# Altium PCB PCB1.PcbDoc
Units mm, origin at the board's own origin, x right, y up, seen from the top; angles counter-clockwise.
Board outline 75 x 64 mm, 4 copper layers (Top Layer, GND 1, GND 2, Bottom Layer), stack 1.783 mm thick; 59 components, 26 nets, 146 pads, 138 vias.
Unrouted connection lines stored in the file: 52.
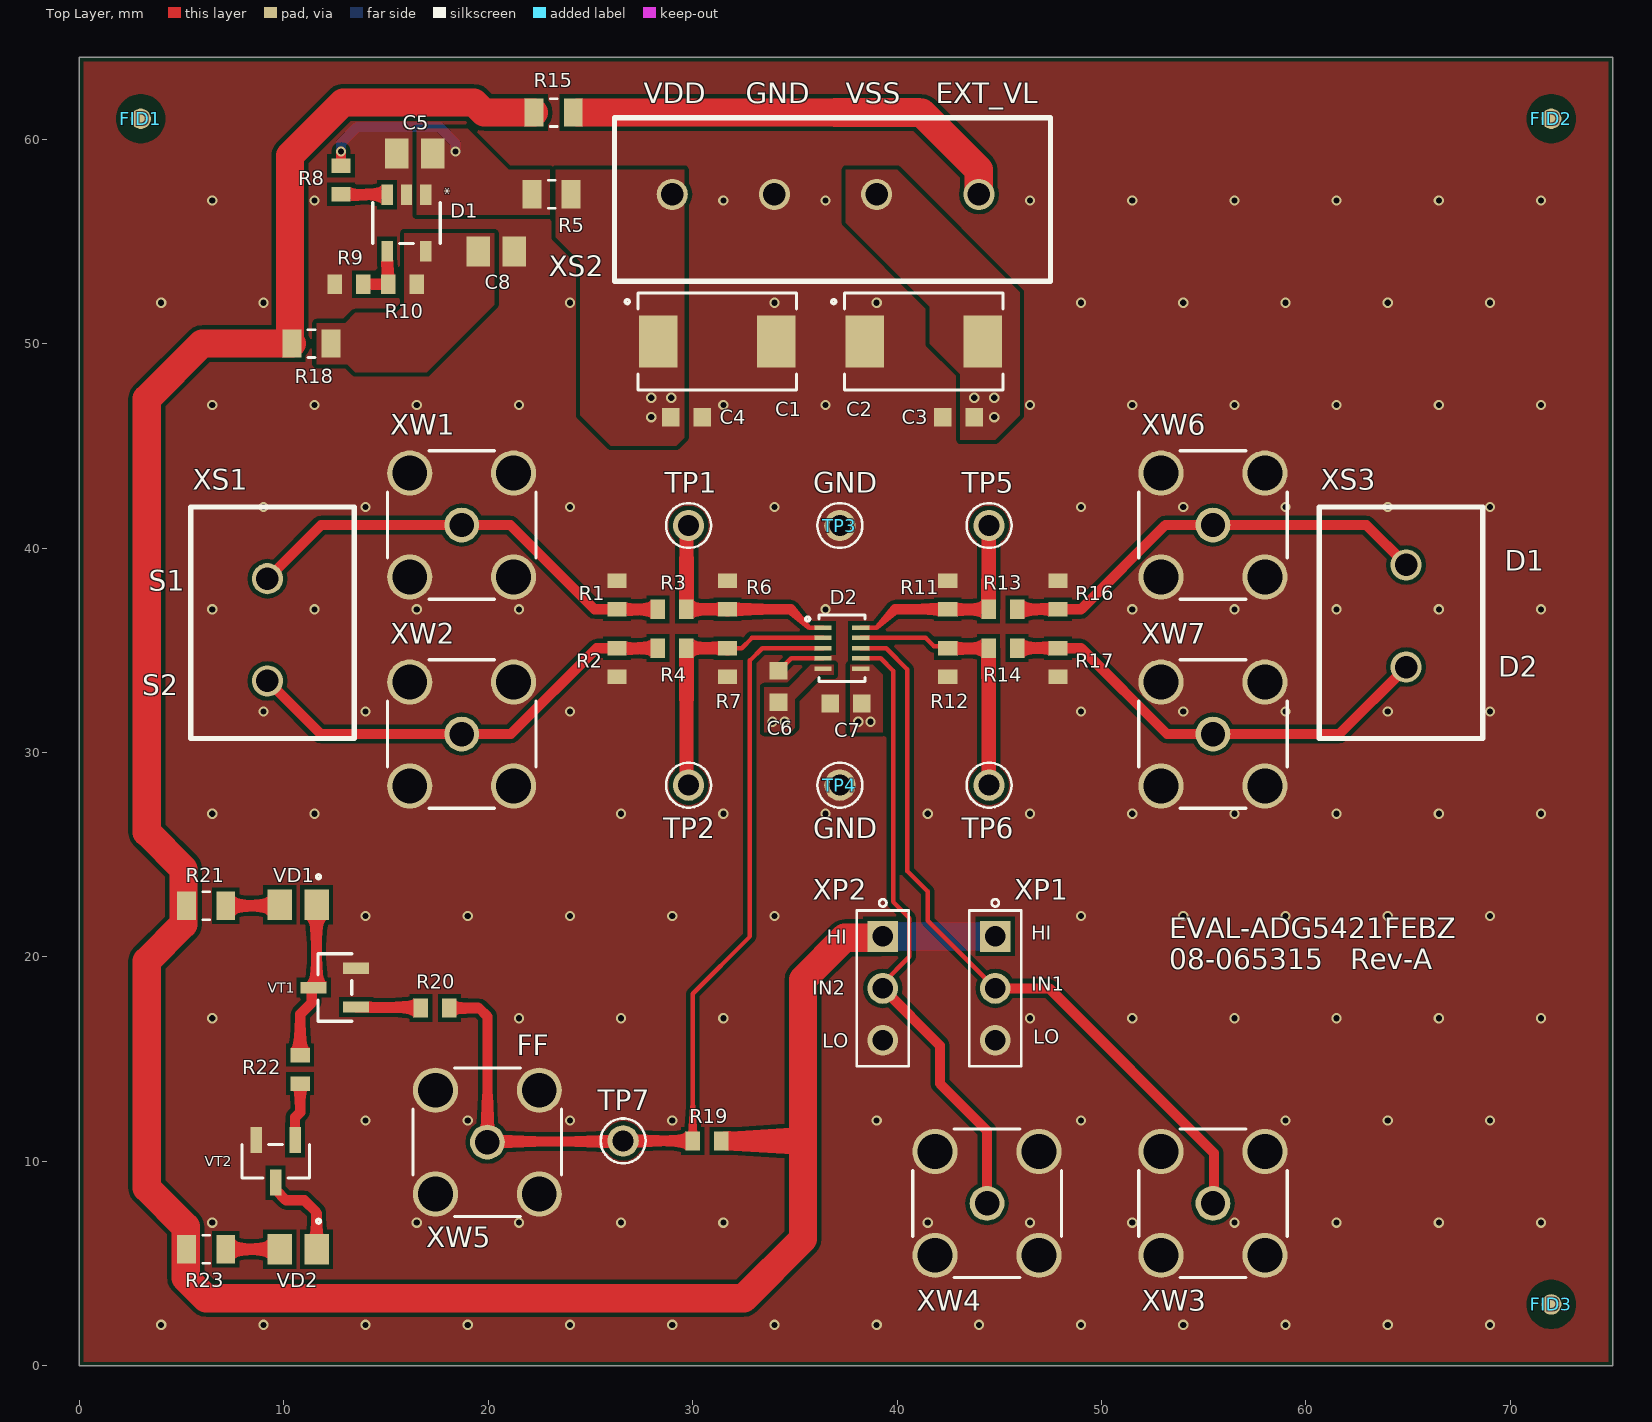
[diagram p0: Top Layer view]
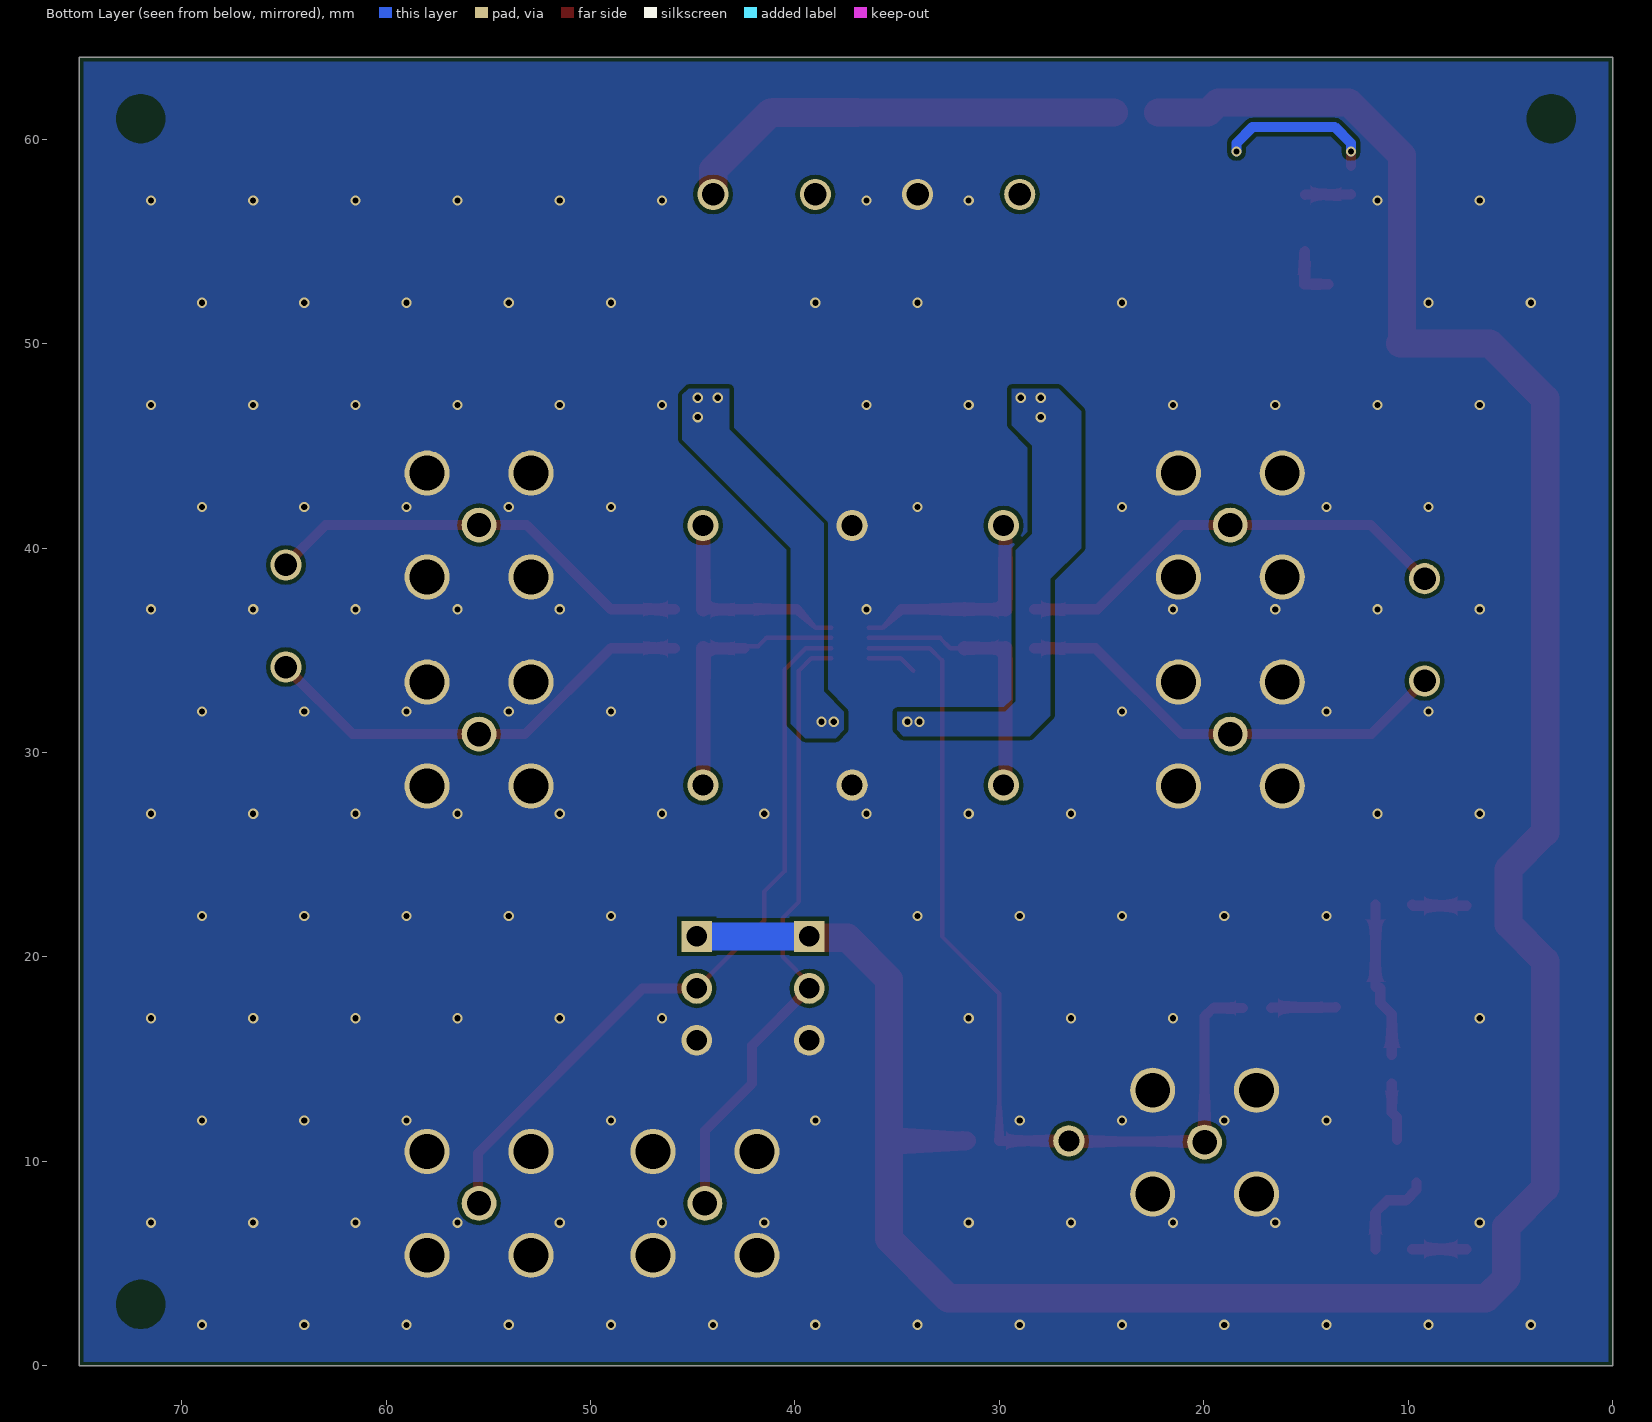
[diagram p1: Bottom Layer view, seen from below]
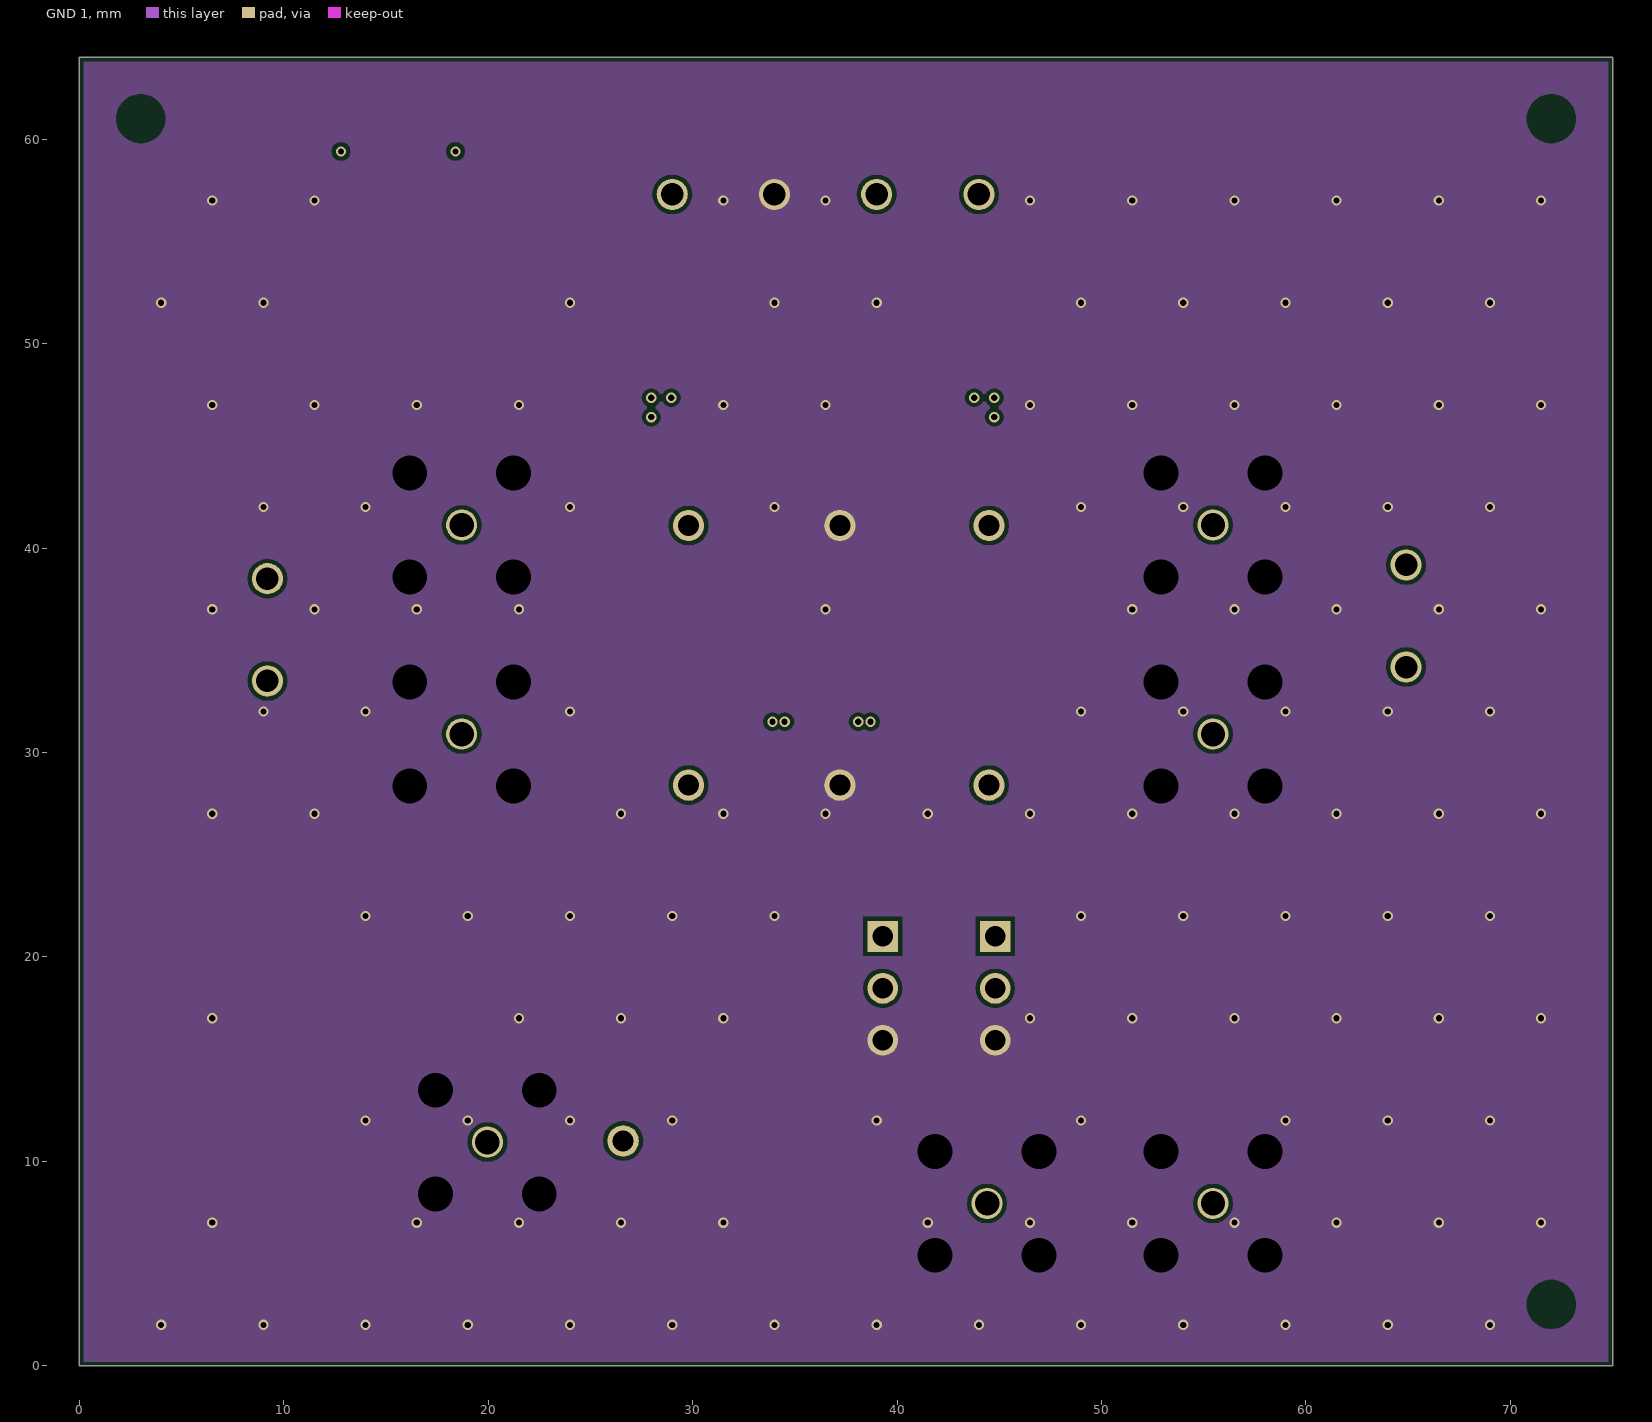
[diagram p2: GND 1]
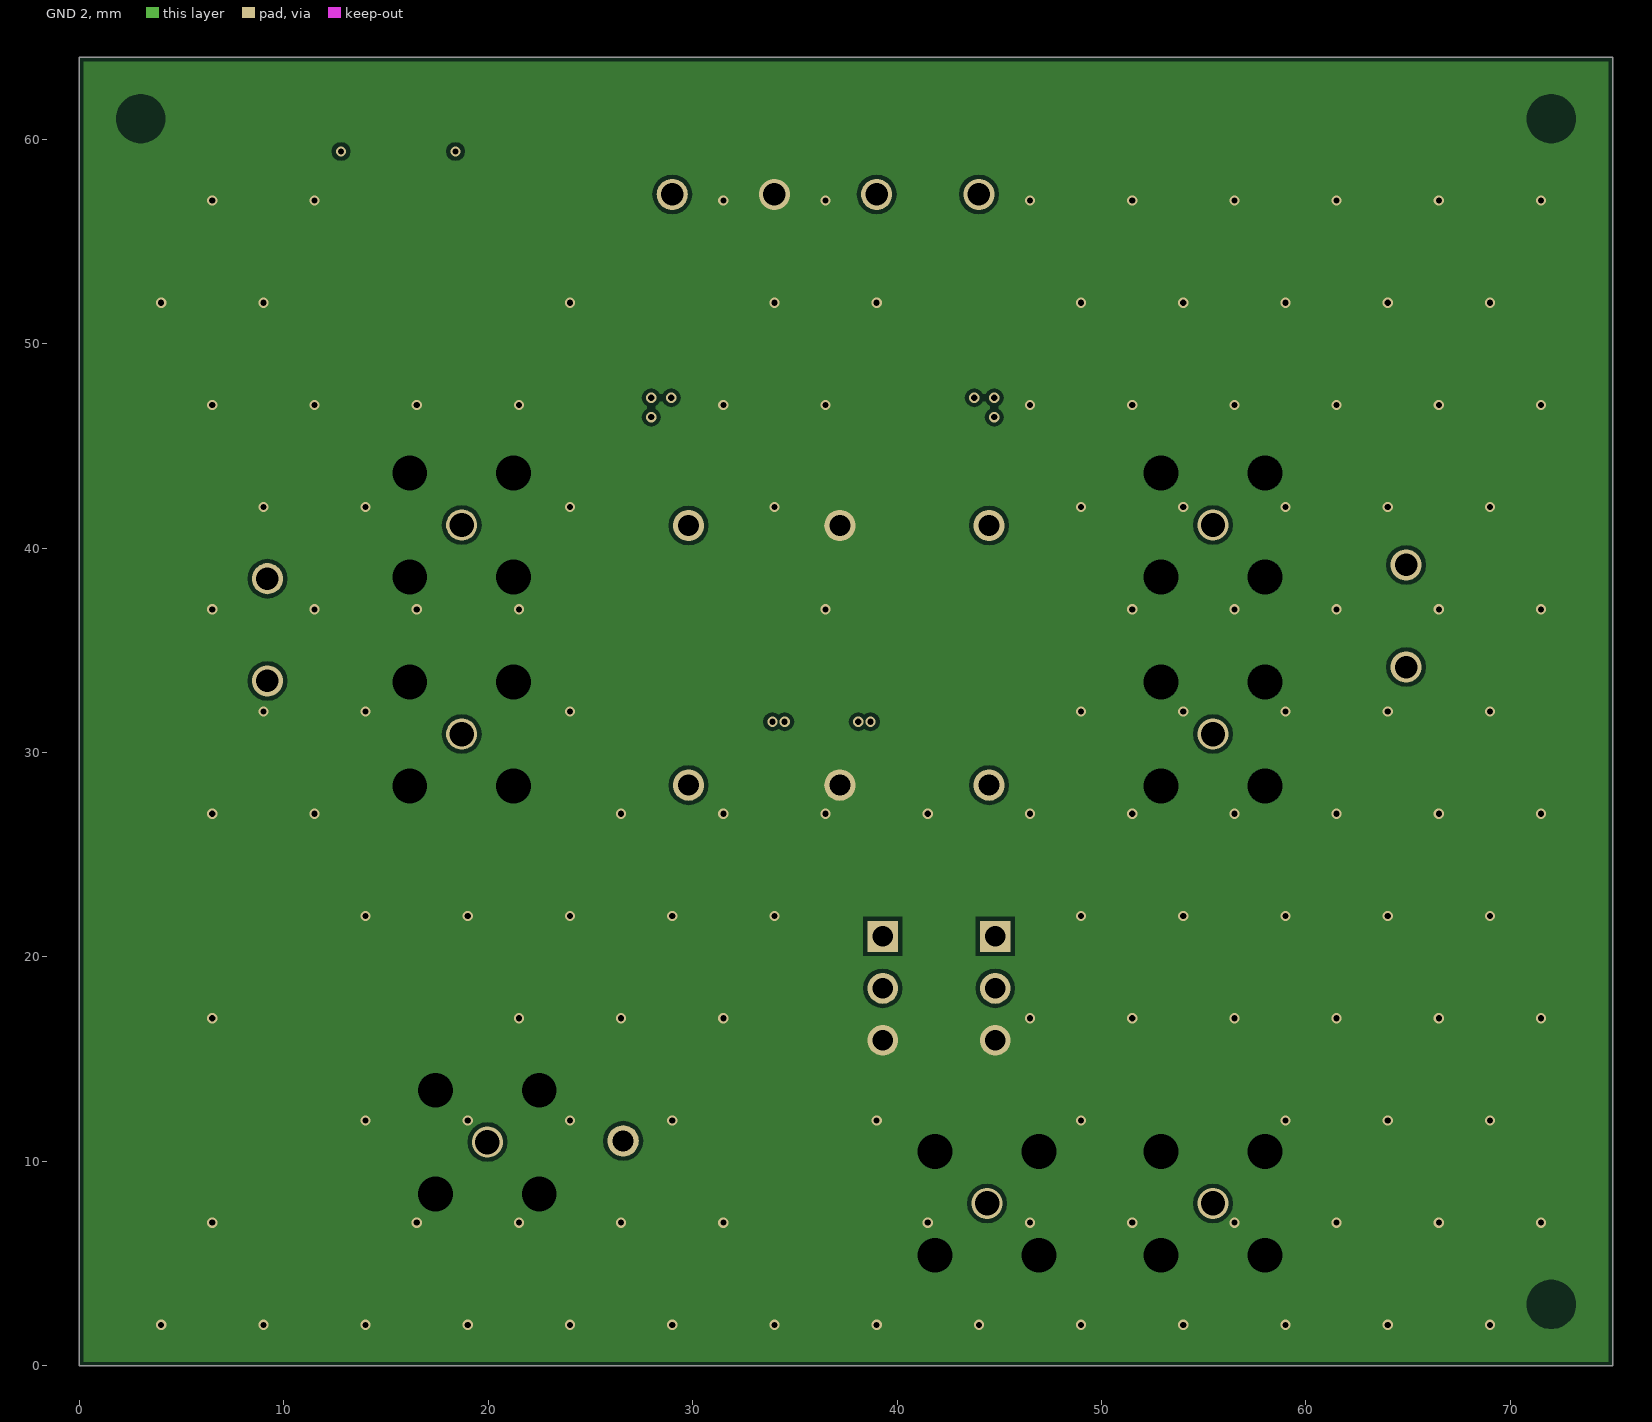
[diagram p3: GND 2]

## Layer stack, top to bottom
Top Solder: solder mask 0.0102, Solder Resist, Dk 3.5
Top Layer: signal copper 0.0356
Dielectric 2: prepreg 0.0711, PP-006, Dk 4.1
GND 1: signal copper 0.035
Dielectric 1: core 1.5, FR-4, Dk 4.8
GND 2: signal copper 0.035
Dielectric 3: prepreg 0.0711, PP-006, Dk 4.1
Bottom Layer: signal copper 0.0356
Bottom Solder: solder mask 0.0102, Solder Resist, Dk 3.5

## Board outline
0,0 75,0 75,64 0,64

## Design rules (kind name [scope] priority, off if disabled: settings)
BoardOutlineClearance [All] p1: gap=0.2 ignorepadtopadclearanceinfootprint=FALSE
Clearance [All] p1: gap=0.2 ignorepadtopadclearanceinfootprint=FALSE
HoleSize [All] p1: absolutevalues=TRUE maxlimit=5 minlimit=0.025 maxpercent=80.000 minpercent=20.000
PolygonConnect [All] p1: connectstyle=Direct reliefconductorwidth=0.254 reliefentries=4 polygonreliefangle="90 Angle" airgapwidth=0.254
RoutingVias [All] p1: holewidth=0.3 width=0.6 viastyle="Through Hole" minholewidth=0.2 minwidth=0.5 maxholewidth=0.4 maxwidth=0.7
SolderMaskExpansion [All] p1: expansion=0.102 istentingtop=FALSE
Width [All] p1: maxlimit=1.5 minlimit=0.2 preferedwidth=0.2
29 further rules are at their usual default settings.

## Components (designator, comment, footprint, x,y, rotation, side; value= is the part's Value field where it differs from the comment)
C1 "CAP_TANT_10uF" CAP_TANT_10UF 31.2,50.1 r0 top value=10мкФ
C2 "CAP_TANT_10uF" CAP_TANT_10UF 41.3,50.1 r0 top value=10мкФ
C3 "CAP_0603_0.1uF" CAP_0603_0.1UF 43,46.4 r180 top value=0.1мкФ
C4 "CAP_0603_0.1uF" CAP_0603_0.1UF 29.7,46.4 r180 top value=0.1мкФ
C5 "CAP_0805_4.7uF" CAP_0805_4.7UF 16.4,59.3 r0 top value=4.7мкФ
C6 "CAP_0603_0.1uF" CAP_0603_0.1UF 34.2,33.228 r270 top value=0.1мкФ
C7 "CAP_0603_0.1uF" CAP_0603_0.1UF 37.5,32.4 r0 top value=0.1мкФ
C8 "CAP_0805_4.7uF" CAP_0805_4.7UF 20.4,54.5 r180 top value=4.7мкФ
D1 "ADP7142AUJZ-5.0-R7" ADP7142AUJZ-5.0-R7 16,55.9 r270 top
D2 "ADG5421FBCPZ-RL7" ADG5421FBCPZ-RL7 37.3,35.1 r0 top
FID1 "Fiducial" "FIDUCIAL 1MM" 3,61 r90 top
FID2 "Fiducial" "FIDUCIAL 1MM" 72,61 r90 top
FID3 "Fiducial" "FIDUCIAL 1MM" 72,3 r90 top
R1 "RES_0603 0Ohm" "RES_0603 0OHM" 26.3,37.7 r270 top value=0Ом
R2 "RES_0603 0Ohm" "RES_0603 0OHM" 26.3,34.4 r90 top value=0Ом
R3 "RES_0603 0Ohm" "RES_0603 0OHM" 29,37 r180 top value=0Ом
R4 "RES_0603 0Ohm" "RES_0603 0OHM" 29,35.1 r180 top value=0Ом
R5 "RES_0805 0Ohm" "RES_0805 0OHM" 23.1,57.3 r180 top value=0Ом
R6 "RES_0603 0Ohm" "RES_0603 0OHM" 31.7,37.7 r270 top value=0Ом
R7 "RES_0603 0Ohm" "RES_0603 0OHM" 31.7,34.4 r270 top value=0Ом
R8 "RES_0603 0Ohm" "RES_0603 0OHM" 12.8,58 r90 top value=0Ом
R9 "RES_0603 0Ohm" "RES_0603 0OHM" 13.2,52.9 r0 top value=0Ом
R10 "RES_0603 0Ohm" "RES_0603 0OHM" 15.8,52.9 r0 top value=0Ом
R11 "RES_0603 0Ohm" "RES_0603 0OHM" 42.475,37.7 r270 top value=0Ом
R12 "RES_0603 0Ohm" "RES_0603 0OHM" 42.475,34.4 r270 top value=0Ом
R13 "RES_0603 0Ohm" "RES_0603 0OHM" 45.172,37 r0 top value=0Ом
R14 "RES_0603 0Ohm" "RES_0603 0OHM" 45.172,35.1 r0 top value=0Ом
R15 "RES_0805 0Ohm" "RES_0805 0OHM" 23.2,61.3 r180 top value=0Ом
R16 "RES_0603 0Ohm" "RES_0603 0OHM" 47.875,37.7 r270 top value=0Ом
R17 "RES_0603 0Ohm" "RES_0603 0OHM" 47.875,34.4 r90 top value=0Ом
R18 "RES_0805 0Ohm" "RES_0805 0OHM" 11.355,50 r0 top value=0Ом
R19 "RES_0603 1kOhm" "RES_0603 1KOHM" 30.7,11 r0 top value=1кОм
R20 "RES_0603 0Ohm" "RES_0603 0OHM" 17.4,17.5 r180 top value=0Ом
R21 "RES_0805 300Ohm" "RES_0805 300OHM" 6.2,22.5 r180 top value=300Ом
R22 "RES_0603 0Ohm" "RES_0603 0OHM" 10.8,14.5 r270 top value=0Ом
R23 "RES_0805 300Ohm" "RES_0805 300OHM" 6.2,5.7 r180 top value=300Ом
TP1 "Test point" "TEST POINT RED" 29.8,41.1 r0 top
TP2 "Test point" "TEST POINT RED" 29.8,28.4 r0 top
TP3 "Test point" "TEST POINT BLACK" 37.2,41.1 r0 top
TP4 "Test point" "TEST POINT BLACK" 37.2,28.4 r0 top
TP5 "Test point" "TEST POINT RED" 44.5,41.1 r0 top
TP6 "Test point" "TEST POINT RED" 44.5,28.4 r0 top
TP7 "Test point" "TEST POINT RED" 26.6,11 r0 top
VD1 "KP-2012SGC GREEN" "KP-2012SGC GREEN" 10.7,22.55 r270 top
VD2 "KP-2012EC RED" "KP-2012EC RED" 10.7,5.7 r270 top
VT1 "NDS7002A onsemi" NDS7002A 12.5,18.5 r90 top
VT2 "NDS7002A onsemi" NDS7002A 9.6,10 r180 top
XP1 "M20-9990345" M20-9990345 44.8,18.46 r270 top
XP2 "M20-9990345" M20-9990345 39.3,18.46 r270 top
XS1 "CTB5000/2" CTB5000/2 9.2,36 r90 top
XS2 "CTB5000/4" CTB5000/4 36.8,57.3 r0 top
XS3 "CTB5000/2" CTB5000/2 64.9,36.675 r270 top
XW1 "SMB1251B1-3GT30G-50" SMB1251B1-3GT30G-50 18.7,41.125 r0 top
XW2 "SMB1251B1-3GT30G-50" SMB1251B1-3GT30G-50 18.7,30.9 r0 top
XW3 "SMB1251B1-3GT30G-50" SMB1251B1-3GT30G-50 55.45,7.94 r0 top
XW4 "SMB1251B1-3GT30G-50" SMB1251B1-3GT30G-50 44.4,7.94 r0 top
XW5 "SMB1251B1-3GT30G-50" SMB1251B1-3GT30G-50 19.96,10.94 r0 top
XW6 "SMB1251B1-3GT30G-50" SMB1251B1-3GT30G-50 55.45,41.125 r0 top
XW7 "SMB1251B1-3GT30G-50" SMB1251B1-3GT30G-50 55.45,30.9 r0 top

## Footprints (in the part's own frame and the unit in brackets; to place one, negate y for a bottom-side part, rotate by r counter-clockwise, add the part's x,y. Pads: shape width x height; smd on the part's side, far side on the other; paste and mask are expansions set on the pad)
ADG5421FBCPZ-RL7 [mm]
  rect 0.85x0.22 smd paste+0 mask+0: 1(-0.925,1) 2(-0.925,0.5) 3(-0.925,0) 4(-0.925,-0.5) 5(-0.925,-1) 6(0.925,-1) 7(0.925,-0.5) 8(0.925,0) 9(0.925,0.5) 10(0.925,1)
  silkscreen extent -1.78,-1.63 1.13,1.63, body extent -1.05,-1.5 1.05,1.5, height 0.77
ADP7142AUJZ-5.0-R7 [mil]
  rect 39.5x22 smd paste+0 mask+0: 1(-54.25,37.4) 2(-54.25,0) 3(-54.25,-37.4) 4(54.25,-37.4) 5(54.25,37.4)
  silkscreen extent -40,-65 40,65, body extent -60,-60 60,60, height 39
CAP_0603_0.1UF [mil]
  rect 33.78x35 smd paste+0 mask+0: 1(-30.39,0) 2(30.39,0)
  body extent -34,-17 34,17, height 35
CAP_0805_4.7UF [mm]
  rect 1.15x1.47 smd: 1(-0.88,0) 2(0.88,0)
  body extent -1,-0.62 1,0.63, height 1.45
CAP_TANT_10UF [mil]
  rect 74x100 smd paste+0 mask+0: 1(-113.5,0) 2(113.5,0)
  silkscreen extent -177,-93 152,94, body extent -147,-88 147,89, height 124
CTB5000/2 [mm]
  round 1.524 hole 1.1: 1(-2.5,0) 2(2.5,0)
  silkscreen extent -5.33,-4.25 6,3.75, body extent -5,-4 5.7,3.5, height 10.01
CTB5000/4 [mm]
  round 1.524 hole 1.1: 1(-7.8,0) 2(-2.8,0) 3(2.2,0) 4(7.2,0)
  silkscreen extent -10.62,-4.25 10.7,3.75, body extent -10.3,-4 10.37,3.5, height 10.01
"FIDUCIAL 1MM" [mm]
  round 1 smd paste-1 mask+0.5: 1(0,0)
  Multi-Layer pour cut-out: 0,-1.2 -0.459,-1.109 -0.849,-0.849 -1.109,-0.459 -1.2,0 -1.2,0 -1.039,0.6 -0.6,1.039 0,1.2 0,1.2 0.459,1.109 0.849,0.849 1.109,0.459 1.2,0 1.2,0 1.109,-0.459 0.849,-0.849 0.459,-1.109 0,-1.2
"KP-2012EC RED" [mm]
  rect 1.5x1.2 smd: 1(0,-0.9) 2(0,0.9)
  silkscreen extent -1.47,0.9 -1.27,1.1, body extent -0.6,-1 0.65,1, height 1.11
"KP-2012SGC GREEN" [mm]
  rect 1.5x1.2 smd: 1(0,-0.9) 2(0,0.9)
  silkscreen extent -1.47,0.9 -1.27,1.1, body extent -0.6,-1 0.65,1, height 1.11
M20-9990345 [mm]
  rect 1.508x1.508 hole 1: 1(-2.54,0)
  round 1.508 hole 1: 2(0,0) 3(2.54,0)
  silkscreen extent -4.36,-1.27 3.81,1.27, body extent -3.81,-1.27 3.81,1.27, height 8.65
NDS7002A [mil]
  rect 22x50 smd paste+0 mask+0: 1(-37.5,-41) 2(37.5,-41) 3(0,41)
  silkscreen extent -65,-33 65,33, body extent -60,-52 60,52, height 44
"RES_0603 0OHM" [mil]
  rect 27.87x37 smd paste+0 mask+0: 1(-27.44,0) 2(27.44,0)
  body extent -34,-18 34,19, height 22
"RES_0603 1KOHM" [mil]
  rect 27.87x37 smd paste+0 mask+0: 1(-27.44,0) 2(27.44,0)
  body extent -34,-18 34,19, height 22
"RES_0805 0OHM" [mm]
  rect 0.92x1.38 smd: 1(-0.955,0) 2(0.955,0)
  silkscreen extent -0.17,-0.68 0.17,0.68, body extent -1,-0.62 1,0.63, height 0.7
"RES_0805 300OHM" [mm]
  rect 0.92x1.38 smd: 1(-0.955,0) 2(0.955,0)
  silkscreen extent -0.17,-0.68 0.17,0.68, body extent -1,-0.62 1,0.63, height 0.7
SMB1251B1-3GT30G-50 [mil]
  round 67 / inner round 60 / far side round 67 hole 47 paste-33.5 mask+0: 1(0,0)
  round 87 / inner round 60 / far side round 87 hole 67 paste-43.5 mask+0: 2(-100,-100) 2(-100,100) 2(100,-100) 2(100,100)
  silkscreen extent -143,-143 143,143, body extent -138,-138 138,138, height 300
"TEST POINT BLACK" [mm]
  round 1.53 hole 1.02: 1(0,0)
  silkscreen extent -1.1,-1.1 1.1,1.1, body extent -0.75,-0.75 0.75,0.75, height 4.62
"TEST POINT RED" [mm]
  round 1.53 hole 1.02: 1(0,0)
  silkscreen extent -1.1,-1.1 1.1,1.1, body extent -0.75,-0.75 0.75,0.74, height 4.62

## Part data
C1 C2: "CAP TANT 10UF 10% 50V 2917", Manufacturer="KYOCERA AVX", Max Operating Temperature=125, Min Operating Temperature=-55, Package=2917, Part Number=478-2380-6-ND, Tolerance=±10%, Voltage=50В, Mount=SMT, Number of Pins=2, Type="Конденсатор танталовий"
C3 C4 C6 C7: "CAP CER 0.1UF 50V X7R 0603", Dielectric=X7R, Manufacturer="Murata Electronics", Max Operating Temperature=125, Min Operating Temperature=-55, Package=0603, Part Number=490-1519-6-ND, Tolerance=±10%, Voltage=50В, Mount=SMT, Number of Pins=2, Type="Конденсатор керамічний"
C5 C8: "CAP CER 4.7UF 50V X5R 0805", Dielectric=X5R, Manufacturer="TDK Corporation", Max Operating Temperature=85, Min Operating Temperature=-55, Package=0805, Part Number=445-5980-6-ND, Tolerance=±10%, Voltage=50В, Mount=SMT, Number of Pins=2, Type="Конденсатор керамічний"
D1: "IC REG LINEAR 5V 200MA TSOT23-5", Manufacturer="Analog Devices Inc.", Max Operating Temperature=+125°C, Min Operating Temperature=-40°C, Package="SOT-23-5 Thin, TSOT-23-5", Part Number=505-ADP7142AUJZ-5.0-R7DKR-ND, Mount=SMT, Number of Pins=5
D2: "IC SW SPST-NCX2 14OHM 10LFCSP", Manufacturer="Analog Devices Inc.", Max Operating Temperature=+125°C, Min Operating Temperature=-40°C, Package="10-WFDFN, CSP", Part Number=505-ADG5421FBCPZ-RL7DKR-ND, Mount=SMT, Number of Pins=10
FID1 FID2 FID3: library part "FIDUCIAL 1mm", "Fiducial 1mm Pad"
R1 R2 R3 R4 R6 R7 R8 R9 R10 R11 R12 R13 R14 R16 R17 R20 R22: "RES 0 OHM 63mW 0603", Manufacturer=Multicomp, Max Operating Temperature=+155°C, Min Operating Temperature=-55°C, Package=0603, Part Number=MC0603WG00000T5E-TC, Power Rating="63 мВт", Mount=SMT, Number of Pins=2, Type=Резистор
R5 R15 R18: "RES SMD 0 OHM JUMPER 1/8W 0805", Manufacturer="Panasonic Electronic Components", Max Operating Temperature=+155°C, Min Operating Temperature=-55°C, Package=0805, Part Number=ERJ-6GEY0R00V, Mount=SMT, Number of Pins=2, Type=Резистор
R19: "RES 1K OHM 1% 63mW 0603", Manufacturer=Multicomp, Max Operating Temperature=+155°C, Min Operating Temperature=-55°C, Package=0603, Part Number=MC0063W060311K, Power Rating="63 мВт", Tolerance=±1%, Mount=SMT, Number of Pins=2, Type=Резистор
R21 R23: "RES 300 OHM 5% 1/8W 0805", Manufacturer=YAGEO, Max Operating Temperature=+155°C, Min Operating Temperature=-55°C, Package=0805, Part Number=311-300ARDKR-ND, Power Rating=1/8W, Tolerance=±5%, Mount=SMT, Number of Pins=2, Type=Резистор
TP1 TP2 TP5 TP6 TP7: library part "TEST POINT RED", "VERO 20-2137 / PCB Test Point, Red, Through Hole Mount, 1.02 mm, Phosphor Bronze"
TP3 TP4: library part "TEST POINT BLACK", "VERO 20-2137 / PCB Test Point, Black, Through Hole Mount, 1.02 mm, Phosphor Bronze"
VD1: "2-pin, SMT LED, green, forward voltage 2.2V, forward current 20mA", Manufacturer=KINGBRIGHT, Max Opearing Temperature=+85°C, Min Opearing Temperature=-40°C, Part Number=KP-2012SGC, Number of Pins=2, Type=LED
VD2: "2-pin, SMT LED, red, forward voltage 2V, forward current 20mA", Manufacturer=KINGBRIGHT, Max Opearing Temperature=+85°C, Min Opearing Temperature=-40°C, Part Number=KP-2012EC, Number of Pins=2, Type=LED
VT1 VT2: library part NDS7002A, "MOSFET N-CH 60V 280MA SOT-23", Manufacturer=onsemi, Name=NDS7002A
XP1 XP2: "CONN HEADER VERT 3POS 2.54MM", Manufacturer="Harwin Inc.", Max Opearing Temperature=+105°C, Min Opearing Temperature=-40°C, Part Number=952-2263-ND, Number of Pins=3, Type=Male
XS1 XS3: "2-pin, terminal blocks (5 mm pitch), 250V, 16A", Manufacturer=CAMDENBOSS, Max Opearing Temperature=+110°C, Min Opearing Temperature=-25°C, Number of Pins=2, Part Number=CTB5000/2, Type=Female
XS2: "4-pin, terminal blocks (5 mm pitch), 250V, 16A", Manufacturer=CAMDENBOSS, Max Opearing Temperature=+110°C, Min Opearing Temperature=-25°C, Number of Pins=4, Part Number=CTB5000/4, Type=Female
XW1 XW2 XW3 XW4 XW5 XW6 XW7: "50 Ω, SMB connectors", Manufacturer="AMPHENOL RF", Max Operating Temperature=+85°C, Min Operating Temperature=-40°C, Mount=THT, Number of Pins=2, Part Number=SMB1251B1-3GT30G-50, Type="Male Socket"

## Via types
v1: diameter 0.5, hole 0.3, Top Layer to Bottom Layer, tented both sides, 138 vias

## Nets (pads, with @x,y where several pads share a name; then routed paths per layer and width w, separated by ;. In a path a pad name is that pad's centre, name@x,y a point inside that pad or via, vN(x,y) a via of type N, cw(c..) or ccw(c..) an arc to the next point about the centre after c; other vN are vias at no path point)
FF: D2.3 R19.1 R20.1 TP7.1 XW5.1 | length 46.7
  Top Layer w0.22: R19.1 30.003,18.203 32.8,21 32.8,34.5 33.4,35.1 D2.3
  Top Layer w0.5: R20.1 19.55,17.5 19.96,17.09 XW5.1 ; XW5.1@19.99,10.97 TP7.1@26.57,10.97 ; TP7.1 R19.1
  Top Layer w0.7: XW5.1 XW5.1@19.99,10.97 ; TP7.1@26.57,10.97 TP7.1
GND: C1.2 C2.1 C3.2 C4.1 C5.1 C6.1 C7.1 C8.1 D1.2 D2.4 R1.1 R2.1 R6.1 R7.2 R9.1 R11.1 R12.2 R16.1 R17.1 TP3.1 TP4.1 VT1.2 VT2.2 XP1.3 XP2.3 XS2.2 XW1.2 XW2.2 XW3.2 XW4.2 XW5.2 XW6.2 XW7.2 | length 2.4
  Top Layer w0.22: C6.1 34.215,34 34.816,34.6 D2.4
  other v1: 4,2 9,2 14,2 19,2 24,2 29,2 34,2 39,2 44,2 49,2 54,2 59,2 64,2 69,2 6.5,7 16.5,7 21.5,7 26.5,7 31.5,7 41.5,7 46.5,7 51.5,7 56.5,7 61.5,7 66.5,7 71.5,7 14,12 19,12 24,12 29,12 39,12 49,12 59,12 64,12 69,12 6.5,17 21.5,17 26.5,17 31.5,17 46.5,17 51.5,17 56.5,17 61.5,17 66.5,17 71.5,17 14,22 19,22 24,22 29,22 34,22 49,22 54,22 59,22 64,22 69,22 6.5,27 11.5,27 26.5,27 31.5,27 36.5,27 41.5,27 46.5,27 51.5,27 56.5,27 61.5,27 66.5,27 71.5,27 9,32 14,32 24,32 49,32 54,32 59,32 64,32 69,32 6.5,37 11.5,37 16.5,37 21.5,37 36.5,37 51.5,37 56.5,37 61.5,37 66.5,37 71.5,37 9,42 14,42 24,42 34,42 49,42 54,42 59,42 64,42 69,42 6.5,47 11.5,47 16.5,47 21.5,47 31.5,47 36.5,47 46.5,47 51.5,47 56.5,47 61.5,47 66.5,47 71.5,47 4,52 9,52 24,52 34,52 39,52 49,52 54,52 59,52 64,52 69,52 6.5,57 11.5,57 31.5,57 36.5,57 46.5,57 51.5,57 56.5,57 61.5,57 66.5,57 71.5,57
IN1: D2.8 XP1.2 XW3.1 | length 36.6
  Top Layer w0.22: D2.8 39.462,35.1 40.5,34.062 40.5,27.646 40.5,24.2 41.5,23.2 41.5,21.76 XP1.2
  Top Layer w0.5: XP1.2 47.44,18.46 55.5,10.4 55.5,7.99 XW3.1
IN2: D2.7 XP2.2 XW4.1 | length 30.9
  Top Layer w0.22: D2.7 39.2,34.6 39.8,34 39.8,22.7 40.6,21.9 40.6,20 39.3,18.7 XP2.2
  Top Layer w0.5: XP2.2 42.1,15.66 42.1,13.8 44.4,11.5 XW4.1
NetC5_2: C5.2 D1.1 R5.2 R8.2 | length 7.8
  Top Layer w0.5: R8.2 v1(12.8,59.4)
  Bottom Layer w0.5: v1(12.8,59.4) 12.8,59.8 13.6,60.6 17.6,60.6 18.4,59.8 v1(18.4,59.4)
NetC8_2: C8.2 D1.5 R10.2 R18.2
NetD1_3: D1.3 R8.1 | length 2.3
  Top Layer w0.5: R8.1 12.813,57.291 15.037,57.291 D1.3
NetD1_4: D1.4 R9.2 R10.1 | length 2.9
  Top Layer w0.5: R9.2 R10.1 15.077,52.927 15.077,54.495 D1.4
NetD2_1: D2.1 R3.1 R6.2 TP1.1 | length 11.2
  Top Layer w0.22: 34.797,37.003 35.7,36.1 D2.1
  Top Layer w0.5: R3.1@29.698,37.002 R6.2@31.698,37.002 ; R6.2 34.797,37.003
  Top Layer w0.7: R3.1 29.698,37.002 29.7,37.003 29.7,41 TP1.1 ; R6.2@31.698,37.002 R6.2
NetD2_2: D2.2 R4.1 R7.1 TP2.1 | length 13.6
  Top Layer w0.22: R7.1 31.703,35.1 32.4,35.1 32.9,35.6 D2.2
  Top Layer w0.5: R4.1@29.698,35.098 R7.1@31.698,35.098
  Top Layer w0.7: R4.1 29.698,35.098 29.7,35.097 29.7,28.5 TP2.1 ; R7.1@31.698,35.098 R7.1
NetD2_9: D2.9 R12.1 R14.1 TP6.1 | length 13.2
  Top Layer w0.22: D2.9 41.4,35.6 41.804,35.196 42.376,35.196 R12.1 ; R14.1@44.472,35.097 R14.1
  Top Layer w0.5: R12.1 R14.1@44.472,35.097
  Top Layer w0.7: R14.1 44.479,35.096 44.479,28.421 TP6.1
NetD2_10: D2.10 R11.2 R13.1 TP5.1 | length 10.7
  Top Layer w0.22: D2.10 39,36.1 39.903,37.003
  Top Layer w0.5: 39.903,37.003 R11.2 R11.2 44.473,37.002 R13.1
  Top Layer w0.7: R13.1 44.479,37.004 44.479,41.079 TP5.1
NetR1_2: R1.2 R3.2 XS1.2 XW1.1 | length 21.9
  Top Layer w0.5: XS1.2 11.825,41.125 XW1.1 21.075,41.125 25.2,37 26.297,37 R1.2 R1.2 28.302,37.002 R3.2
NetR2_2: R2.2 R4.2 XS1.1 XW2.1 | length 21.9
  Top Layer w0.5: XS1.1 11.8,30.9 XW2.1 21.1,30.9 25.3,35.1 26.297,35.1 R2.2 R2.2 28.302,35.098 R4.2
NetR13_2: R13.2 R16.2 XS3.1 XW6.1 | length 21.6
  Top Layer w0.5: R13.2 45.87,37.002 47.873,37.002 R16.2 47.878,37 49,37 53.125,41.125 XW6.1 62.95,41.125 XS3.1
NetR14_2: R14.2 R17.2 XS3.2 XW7.1 | length 22.1
  Top Layer w0.5: R14.2 45.87,35.098 47.873,35.098 R17.2 47.878,35.1 49,35.1 53.2,30.9 XW7.1 61.625,30.9 XS3.2
NetR15_1: R15.1 XS2.4 | length 22
  Top Layer w1.38: R15.1@24.4,61.3 41.2,61.3
  Top Layer w1.4: 41.2,61.3 44,58.5 XS2.4
NetR20_2: R20.2 VT1.1 | length 3.2
  Top Layer w0.5: VT1.1 13.565,17.524 16.679,17.524 R20.2
NetR21_1: R21.1 VD1.1 | length 2.7
  Top Layer w0.5: R21.1 9.75,22.5 VD1.1
NetR22_1: R22.1 VD1.2 VT1.3 | length 7.8
  Top Layer w0.5: R22.1 10.8,17.201 11.362,17.763 11.362,18.471 11.392,18.5 VT1.3 11.571,18.5 11.6,18.529 VD1.2
NetR22_2: R22.2 VT2.1 | length 2.9
  Top Layer w0.5: VT2.1 10.553,12.153 10.8,12.4 R22.2
NetR23_1: R23.1 VD2.1 | length 2.6
  Top Layer w0.5: R23.1 VD2.1
NetVD2_2: VD2.2 VT2.3 | length 4.6
  Top Layer w0.5: VT2.3 9.6,8.603 10.103,8.1 11,8.1 11.6,7.5 VD2.2
Vdd: C1.1 C4.2 C6.2 D2.5 R5.1 XS2.1
  other v1: 33.9,31.5 34.5,31.5 27.975,46.4 27.975,47.35 28.95,47.35
VL: R15.2 R18.1 R19.2 R21.2 R23.2 XP1.1 XP2.1 | length 134.4
  Top Layer w0.9: R19.2@31.6,11 35.4,11
  Top Layer w1.38: R18.1@10.3,50.1 10.3,59.2 12.9,61.8 19.3,61.8 19.8,61.3 R15.2 ; R18.1 6,50 3.3,47.3 3.3,26.1 5.1,24.3 5.1,22.5 5.1,21.6 3.3,19.8 3.3,8.7 5.2,6.8 5.2,5.7 5.2,4.3 6.2,3.3 32.5,3.3 35.4,6.2 35.4,11 35.4,18.9 37.436,20.936 39.236,20.936 XP2.1
  Bottom Layer w1.38: XP2.1 XP1.1
Vss: C2.2 C3.1 C7.2 D2.6 XS2.3
  other v1: 38.1,31.5 38.7,31.5 44.75,46.4 43.775,47.35 44.75,47.35
pads on no net: FID1.1 FID2.1 FID3.1

## Polygon pours and split planes (outlines as drawn)
GND on Top Layer "GND_L01_P014" (solid, pour order 14): 0,0 75,0 75,64 0,64
NetC8_2 on Top Layer "NONET_L-01_P-001" (solid, pour order 2): 11.6,51 11.6,49 13.1,49 13.5,48.6 17,48.6 20.3,51.9 20.3,55.4 15.9,55.4 15.9,51.9 15.5,51.5 13.5,51.5 13,51
Vss on Top Layer "NONET_L-01_P-001" (solid, pour order 8): 37.7,34.3 37.7,31 39.3,31 39.3,33.8 38.8,34.3
Vdd on Top Layer "NONET_L-01_P-001" (solid, pour order 7): 33.5,33.2 33.5,31 34.8,31 35,31.2 35,32.6 36.2,33.8 36.9,33.8 36.9,34.325 35.825,34.325 34.7,33.2
Vss on Top Layer "NONET_L-01_P-001" (solid, pour order 4): 37.5,58.5 40,58.5 46,52.5 46,46.5 44.8,45.3 43.1,45.3 43.1,48.5 41.6,50 41.6,51.8 37.5,55.9
Vdd on Top Layer "NONET_L-01_P-001" (solid, pour order 3): 23.3,58.5 29.6,58.5 29.6,45.4 29.2,45 26,45 24.5,46.5 24.5,54 23.3,55.2
NetC5_2 on Top Layer "NONET_L-01_P-001" (solid, remove dead copper, pour order 0): 23,58.5 23,56.3 16.5,56.3 16.5,60.5 19,60.5 21,58.5
GND on Bottom Layer "GND_L04_P013" (solid, pour order 13): 0,0 75,0 75,64 0,64
Vss on Bottom Layer "NONET_L-01_P-001" (solid, pour order 6): 37.6,32 37.6,31.1 38,30.7 39.5,30.7 40.2,31.4 40.2,40 45.5,45.3 45.5,47.5 45.2,47.8 43.2,47.8 43.2,45.8 38.6,41.2 38.6,33
Vdd on Bottom Layer "NONET_L-01_P-001" (solid, pour order 5): 29.4,47.8 27.1,47.8 26,46.7 26,40 27.5,38.5 27.5,31.8 28.5,30.8 34.7,30.8 35,31.1 35,32 29.7,32 29.2,32.5 29.2,39.9 28.4,40.7 28.4,45 29.4,46
GND on GND 1 "GND_L02_P011" (solid, pour order 11): 0,0 75,0 75,64 0,64
GND on GND 2 "GND_L03_P012" (solid, pour order 12): 0,0 75,0 75,64 0,64

## Silkscreen, mask and mechanical layers (free items; w line width, h text height)
Top Overlay:
  text "VDD" at 27.6,61.767 h1
  text "GND" at 32.6,61.767 h1
  text "VSS" at 37.5,61.767 h1
  text "EXT_VL" at 41.9,61.767 h1
  text "GND" at 35.9,42.7 h1
  text "D1" at 69.733,38.9 h1
  text "S1" at 3.4,37.9 h1
  text "D2" at 69.4,33.7 h1
  text "S2" at 3.067,32.8 h1
  text "GND" at 35.9,25.8 h1
  text "HI" at 46.55,20.85 h0.7
  text "HI" at 36.55,20.65 h0.7
  text "EVAL-ADG5421FEBZ / 08-065315   Rev-A" at 53.3,19.4 h1
  text "IN1" at 46.55,18.35 h0.7
  text "IN2" at 35.85,18.15 h0.7
  text "LO" at 46.65,15.75 h0.7
  text "LO" at 36.35,15.55 h0.7
  text "FF" at 21.4,15.2 h1
Board:
  the board outline again, w0.125

## Text inside footprints (layer, text, board x,y; h text height)
D1: Top Overlay "*" at 17.65,57.625 h0.5 r270; Top Assembly "*" at 16.6,56.6 h0.7 r270